# Altium PCB Board.PcbDoc
Units mil, origin at the board's own origin, x right, y up, seen from the top; angles counter-clockwise.
Board outline 6000 x 4000 mil, 2 copper layers (Top Layer, Bottom Layer); 112 components, 93 nets, 348 pads, 0 vias.
Unrouted connection lines stored in the file: 236.
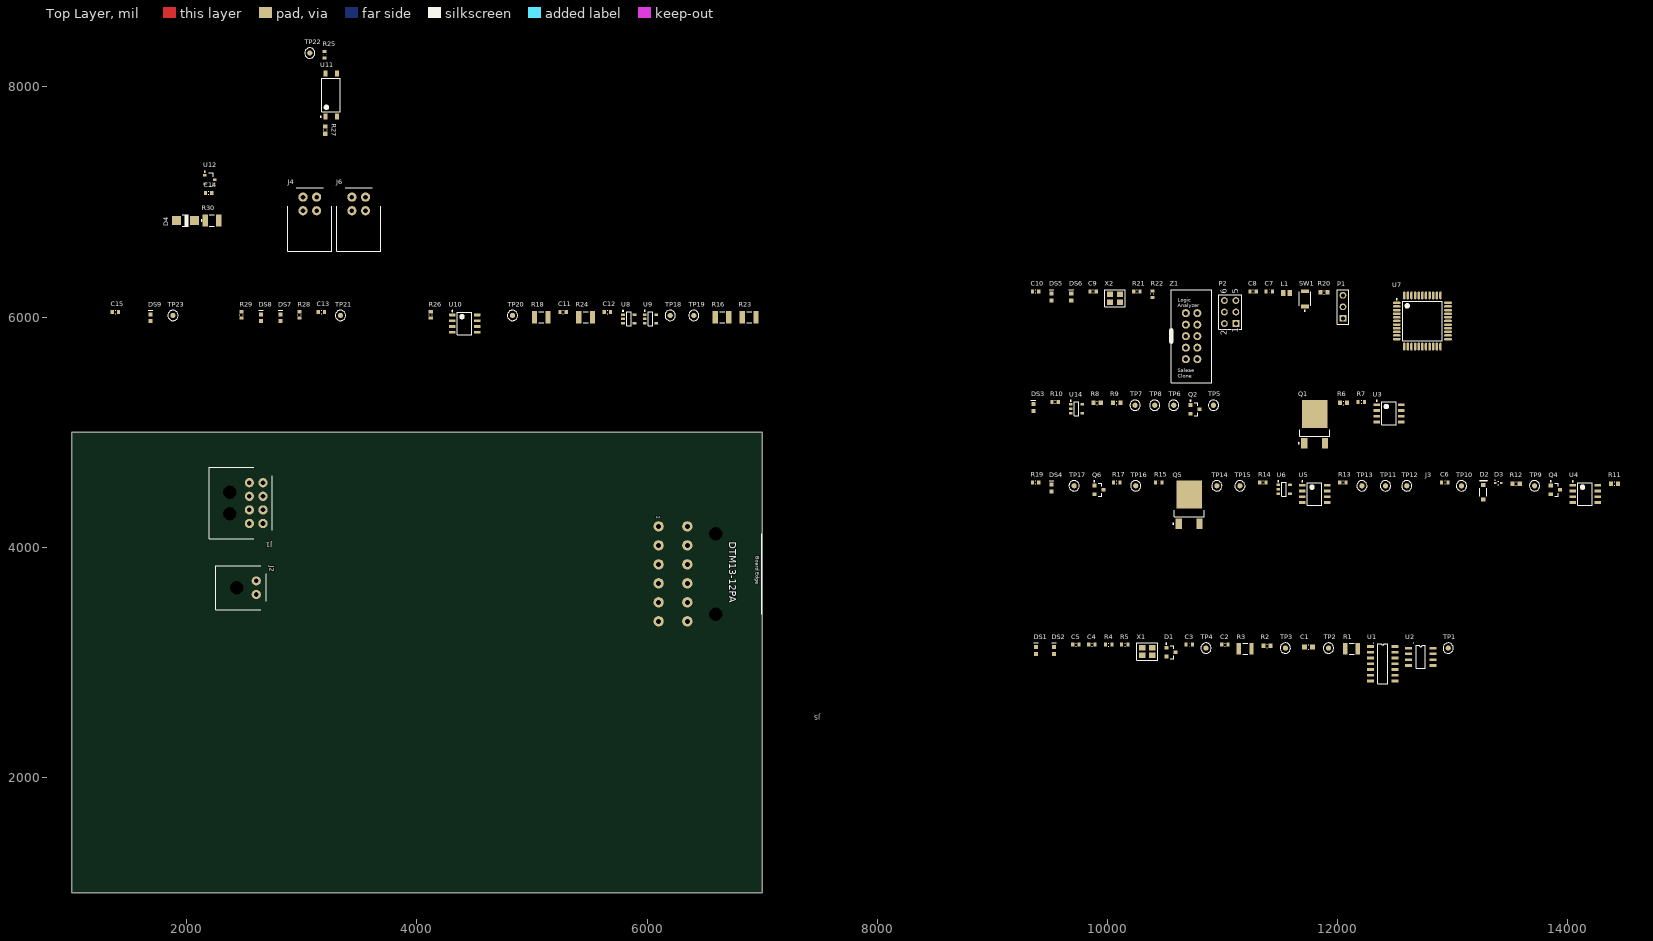
[diagram p0: Top Layer view]
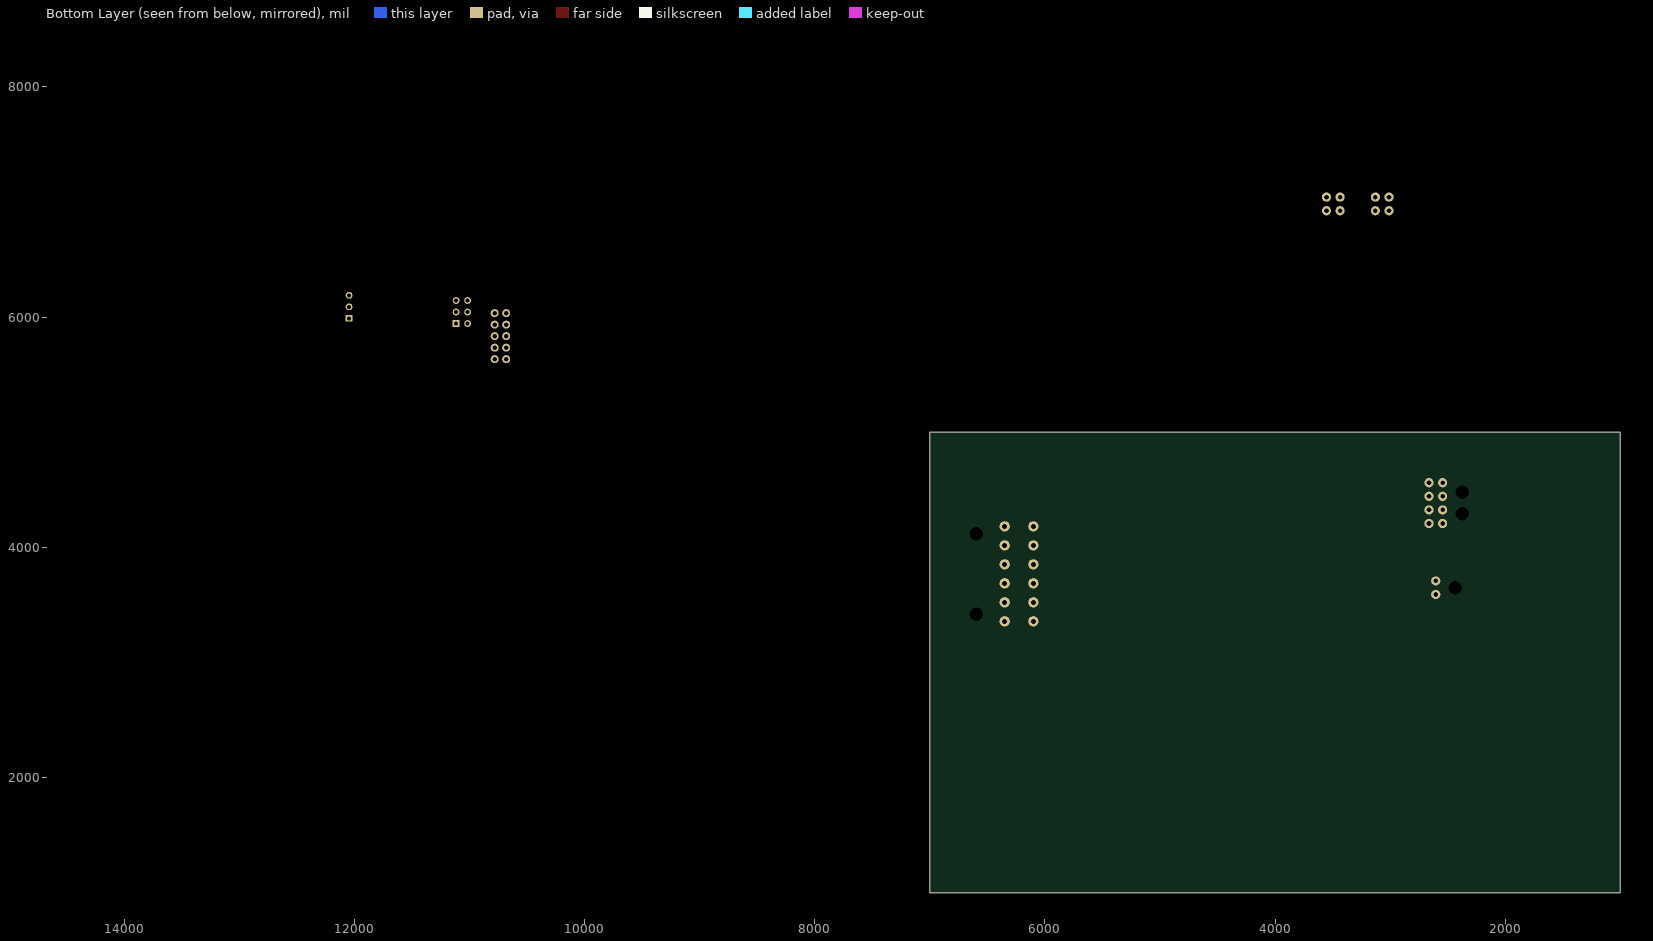
[diagram p1: Bottom Layer view, seen from below]

## Layer stack, top to bottom
Top Solder: solder mask 0.4, Solder Resist, Dk 3.5
Top Layer: signal copper 1.4
Dielectric 1: dielectric 12.6, FR-4, Dk 4.8
Bottom Layer: signal copper 1.4
Bottom Solder: solder mask 0.4, Solder Resist, Dk 3.5

## Board outline
1000,1000 7000,1000 7000,5000 1000,5000

## Design rules (kind name [scope] priority, off if disabled: settings)
Clearance [All] p1: gap=10 ignorepadtopadclearanceinfootprint=FALSE except(0: Arc-Hole Track-Hole SMDPad-Hole THPad-Hole Via-Hole Fill-Hole Poly-Hole Region-Hole Text-Hole)
PolygonConnect [All] p1: connectstyle=Relief reliefconductorwidth=10 reliefentries=4 polygonreliefangle="90 Angle" airgapwidth=10
RoutingVias [All] p1: holewidth=28 width=50 viastyle="Through Hole" minholewidth=28 minwidth=50 maxholewidth=28 maxwidth=50
SolderMaskExpansion [All] p1: expansion=4
Width [All] p1: maxlimit=10 minlimit=10 preferedwidth=10
30 further rules are at their usual default settings.

## Classes and differential pairs
component class "Tractive System Active Light Driving Circuity (TSAL)": C11 C12 C13 C14 C15 D4 DS7 DS8 DS9 R16 R18 R23 R24 R25 R26 R27 R28 R29 R30 TP18 TP19 TP20 TP21 TP22 TP23 U8 U9 U10 U11 U12
component class Microcontroller: C7 C8 C9 C10 DS5 DS6 L1 P1 P2 R20 R21 R22 SW1 U7 X2 Z1
component class "Insulation Monitoring Device": DS3 J1 Q1 Q2 R6 R7 R8 R9 R10 TP5 TP6 TP7 TP8 U3 U14
component class "Current Sensor (LEM)": C6 D2 D3 DS4 J2 J3 Q4 Q5 Q6 R11 R12 R13 R14 R15 R17 R19 TP9 TP10 TP11 TP12 TP13 TP14 TP15 TP16 TP17 U4 U5 U6 VR1
component class Connector: J4 J5 J6
component class CANBUS: C1 C2 C3 C4 C5 D1 DS1 DS2 R1 R2 R3 R4 R5 TP1 TP2 TP3 TP4 U1 U2 X1

## Components (designator, comment, footprint, x,y, rotation, side; value= is the part's Value field where it differs from the comment)
C1 "CAP 4.7nF 50V 0603(1608)" CAPC0603(1608)100_M 11745,3135 r0 top value=4.7nF
C2 "CAP 100nF 50V 0603(1608)" CAPC0603(1608)100_L 11020,3155 r0 top value=100nF
C3 "CAP 100nF 50V 0603(1608)" CAPC0603(1608)100_L 10710,3155 r0 top value=100nF
C4 "CAP 18pF 50V 0603(1608)" CAPC0603(1608)100_L 9865,3155 r0 top value=18pF
C5 "CAP 18pF 50V 0603(1608)" CAPC0603(1608)100_L 9725,3155 r0 top value=18pF
C6 "CAP 100nF 50V" CAPC0603(1608)100_L 12930,4565 r0 top value=100nF
C7 "CAP 100nF 50V 0603(1608)" CAPC0603(1608)100_L 11405,6225 r0 top value=100nF
C8 "CAP 100nF 50V 0603(1608)" CAPC0603(1608)100_L 11265,6225 r0 top value=100nF
C9 "CAP 18pF 50V 0603(1608)" CAPC0603(1608)100_L 9875,6225 r0 top value=18pF
C10 "CAP 18pF 50V 0603(1608)" CAPC0603(1608)100_L 9375,6225 r0 top value=18pF
C11 "CAP 100nF 50V" CAPC0603(1608)100_L 5270.94,6045 r0 top value=100nF
C12 "CAP 100nF 50V" CAPC0603(1608)100_L 5655.94,6045 r0 top value=100nF
C13 "CAP 100nF 50V" CAPC0603(1608)100_L 3170.94,6045 r0 top value=100nF
C14 "CAP 100nF 50V" CAPC0603(1608)100_L 2190,7080 r0 top value=100nF
C15 "CAP 100nF 50V" CAPC0603(1608)100_L 1380.94,6045 r0 top value=100nF
D1 "NUP2105LT1G" ONSC-SOT-23-3-318-08_V 10550,3090 r0 top
D2 "BZT52C5V1-7-F" DIOD-SOD123_V 13265,4480 r90 top
D3 "ESD5Z5.0T1G" ONSC-SOD-523-2-502-01_V 13395,4560 r0 top
D4 "18V Zener SMA" ONSC-SMA-2-403D-02_F_V 1990,6840 r180 top
DS1 "LED Blue 0603" "LED BLUE 0603" 9380,3105 r90 top
DS2 "LED Blue 0603" "LED BLUE 0603" 9535,3105 r90 top
DS3 "LED Red 0603" "LED RED 0603" 9355,5215 r90 top
DS4 "LED Red 0603" "LED RED 0603" 9515,4515 r90 top
DS5 "LED Orange 0603" "LED ORANGE 0603" 9515,6175 r90 top
DS6 "LED Orange 0603" "LED ORANGE 0603" 9685,6175 r90 top
DS7 "LED Red 0603" "LED RED 0603" 2815.94,5995 r90 top
DS8 "LED Red 0603" "LED RED 0603" 2645.94,5995 r90 top
DS9 "LED Red 0603" "LED RED 0603" 1685.94,5995 r90 top
J1 "Microfit 3.0 2x4" Microfit_2X4_R_TH 2375,4385 r270 top
J2 "Microfit 3.0 1x2" Microfit_1X2_R_TH 2435,3650 r270 top
J3 "Microfit 3.0 2x3" Microfit_2X3_R_SMD 12760,4580 r90 top
J4 "Microfit 3.0 2x2" Microfit_2X2_R_TH 3070,6755 r0 top
J5 "DTM12" DTM13-12PA 6595,3770 r270 top
J6 "Microfit 3.0 2x2" Microfit_2X2_R_TH 3495,6755 r0 top
L1 "LQM21FN100M70L" MURA-IND0805_L 11555,6210 r0 top
P1 "Header 3" HDR1X3 12045,5990 r90 top
P2 "Header 3X2" HDR2X3 11115,5945 r90 top
Q1 "SUD50P06-15-GE3" VSIL-TO-252AA-3_V 11800,5070 r90 top
Q2 "NVR5198NLT1G" ONSC-SOT-23-3-318-08_V 10760,5200 r0 top
Q4 "NVR5198NLT1G" ONSC-SOT-23-3-318-08_V 13890,4500 r0 top
Q5 "SUD50P06-15-GE3" VSIL-TO-252AA-3_V 10710,4370 r90 top
Q6 "NVR5198NLT1G" ONSC-SOT-23-3-318-08_V 9925,4500 r0 top
R1 "60R4 1% 1210(3225)" RESC1210(3225)_L 12120,3120 r0 top value="60.40 Ohm"
R2 "300R 5% 0603(1608)" RESC0603(1608)_N 11385,3145 r0 top value="300.00 Ohm"
R3 "60R4 1% 1210(3225)" RESC1210(3225)_L 11195,3120 r0 top value="60.40 Ohm"
R4 "1K 5% 0603(1608)" RESC0603(1608)_L 10010,3155 r0 top value="1000.00 Ohm"
R5 "1K 5% 0603(1608)" RESC0603(1608)_L 10150,3155 r0 top value="1000.00 Ohm"
R6 "2K2 5% 0603(1608)" RESC0603(1608)_N 12050,5255 r0 top value="2200.00 Ohm"
R7 "1K 5% 0603(1608)" RESC0603(1608)_L 12205,5265 r0 top value="1000.00 Ohm"
R8 "2K2 5% 0603(1608)" RESC0603(1608)_N 9910,5255 r0 top value="2200.00 Ohm"
R9 "2K2 5% 0603(1608)" RESC0603(1608)_N 10080,5255 r0 top value="2200.00 Ohm"
R10 "1K 5% 0603(1608)" RESC0603(1608)_L 9545,5265 r0 top value="1000.00 Ohm"
R11 "10K 5% 0603(1608)" RESC0603(1608)_N 14405,4555 r0 top value="10000.00 Ohm"
R12 "4K7 5% 0603(1608)" RESC0603(1608)_N 13550,4555 r0 top value="4700.00 Ohm"
R13 "1K 5% 0603(1608)" RESC0603(1608)_L 12045,4565 r0 top value="1000.00 Ohm"
R14 "1K 5% 0603(1608)" RESC0603(1608)_L 11350,4565 r0 top value="1000.00 Ohm"
R15 "1K 5% 0603(1608)" RESC0603(1608)_L 10445,4565 r0 top value="1000.00 Ohm"
R16 "9K1 5% 1210(3225)" RESC1210(3225)_N 6650.94,6000 r0 top value="9100.00 Ohm"
R17 "DNP" RESC0603(1608)_L 10080,4565 r0 top
R18 "1K 5% 1210(3225)" RESC1210(3225)_N 5080.94,6000 r0 top value="1000.00 Ohm"
R19 "DNP" RESC0603(1608)_L 9375,4565 r0 top
R20 "10K 5% 0603(1608)" RESC0603(1608)_N 11880,6215 r0 top value="10000.00 Ohm"
R21 "1K 5% 0603(1608)" RESC0603(1608)_L 10255,6225 r0 top value="1000.00 Ohm"
R22 "1K 5% 0603(1608)" RESC0603(1608)_L 10390,6200 r90 top value="1000.00 Ohm"
R23 "1K 5% 1210(3225)" RESC1210(3225)_N 6885.94,6000 r0 top value="1000.00 Ohm"
R24 "1K 5% 1210(3225)" RESC1210(3225)_N 5465.94,6000 r0 top value="1000.00 Ohm"
R25 "1K 5% 0603(1608)" RESC0603(1608)_L 3198.5,8280 r90 top value="1000.00 Ohm"
R26 "1K 5% 0603(1608)" RESC0603(1608)_L 4120.94,6020 r90 top value="1000.00 Ohm"
R27 "2K2 5% 0603(1608)" RESC0603(1608)_N 3205,7625 r270 top value="2200.00 Ohm"
R28 "1K 5% 0603(1608)" RESC0603(1608)_L 2980.94,6020 r90 top value="1000.00 Ohm"
R29 "1K 5% 0603(1608)" RESC0603(1608)_L 2475.94,6020 r90 top value="1000.00 Ohm"
R30 "1K 5% 1210(3225)" RESC1210(3225)_N 2220,6840 r0 top value="1000.00 Ohm"
SW1 "B3U-1000P" OMRON-B3U-1000_V 11715,6160 r90 top
TP1 "TestPoint_SMD" TestPointSMD 12960,3125 r0 top
TP2 "TestPoint_SMD" TestPointSMD 11920,3125 r0 top
TP3 "TestPoint_SMD" TestPointSMD 11545,3125 r0 top
TP4 "TestPoint_SMD" TestPointSMD 10855,3125 r0 top
TP5 "TestPoint_SMD" TestPointSMD 10920,5235 r0 top
TP6 "TestPoint_SMD" TestPointSMD 10575,5235 r0 top
TP7 "TestPoint_SMD" TestPointSMD 10240,5235 r0 top
TP8 "TestPoint_SMD" TestPointSMD 10410,5235 r0 top
TP9 "TestPoint_SMD" TestPointSMD 13710,4535 r0 top
TP10 "TestPoint_SMD" TestPointSMD 13075,4535 r0 top
TP11 "TestPoint_SMD" TestPointSMD 12415,4535 r0 top
TP12 "TestPoint_SMD" TestPointSMD 12600,4535 r0 top
TP13 "TestPoint_SMD" TestPointSMD 12210,4535 r0 top
TP14 "TestPoint_SMD" TestPointSMD 10950,4535 r0 top
TP15 "TestPoint_SMD" TestPointSMD 11150,4535 r0 top
TP16 "TestPoint_SMD" TestPointSMD 10245,4535 r0 top
TP17 "TestPoint_SMD" TestPointSMD 9710,4535 r0 top
TP18 "TestPoint_SMD" TestPointSMD 6200.94,6015 r0 top
TP19 "TestPoint_SMD" TestPointSMD 6405.94,6015 r0 top
TP20 "TestPoint_SMD" TestPointSMD 4830.94,6015 r0 top
TP21 "TestPoint_SMD" TestPointSMD 3335.94,6015 r0 top
TP22 "TestPoint_SMD" TestPointSMD 3070,8295 r0 top
TP23 "TestPoint_SMD" TestPointSMD 1880.94,6015 r0 top
U1 "MCP2518FD" "MCP2517FD SOIC" 12285,3140 r0 top
U2 "MCP2561" "MCP2561 SOIC" 12615,3125 r0 top
U3 "LM358AM" D0008A_N 12445,5165 r0 top
U4 "LM358AM" D0008A_N 14150,4465 r0 top
U5 "LM358AM" D0008A_N 11800,4465 r0 top
U6 "SN74LVC1G17DBVR" DBV0005A_L 11535,4505 r0 top
U7 "ATmega1284P-AU" 44A_N 12735.12,5967.01 r0 top
U8 "SN74LVC1G17DBVR" DBV0005A_L 5840.94,5985 r0 top
U9 "SN74LVC1G17DBVR" DBV0005A_L 6030.94,5985 r0 top
U10 "LM358AM" D0008A_N 4415.94,5945 r0 top
U11 "TCLT1000" VISH-SOP4L-4_V 3255,7930 r90 top
U12 "LM3480IM3-12" DBZ0003A_L 2201.69,7195 r0 top
U14 "SN74LVC1G17DBVR" DBV0005A_L 9730,5205 r0 top
X1 "XTAL_20Mz_3.2mm*2.5mm" 3.2mm*2.5mm 10345,3095 r0 top
X2 "XTAL_16Mz_3.2mm*2.5mm" 3.2mm*2.5mm 10065,6165 r0 top
Z1 "LogicAnalyzerBreakOut" LogicAnalyzer 10730,5835 r0 top

## Footprints (in the part's own frame and the unit in brackets; to place one, negate y for a bottom-side part, rotate by r counter-clockwise, add the part's x,y. Pads: shape width x height; smd on the part's side, far side on the other; paste and mask are expansions set on the pad)
3.2mm*2.5mm [mm]
  rect 1.4x1.2 smd: 1(-1.1,-0.85) 2(1.1,-0.85) 3(1.1,0.85) 4(-1.1,0.85)
  silkscreen extent -2.29,-1.91 2.29,1.91, body extent -1.6,-1.25 1.6,1.25, height 0.8
44A_N [mm] "Thin QFP, 44-Leads, Body 10x10mm, Pitch 0.8mm, IPC Medium Density"
  oval 1.75x0.55 smd: 1(-5.65,4) 2(-5.65,3.2) 3(-5.65,2.4) 4(-5.65,1.6) 5(-5.65,0.8) 6(-5.65,0) 7(-5.65,-0.8) 8(-5.65,-1.6) 9(-5.65,-2.4) 10(-5.65,-3.2) 11(-5.65,-4) 23(5.65,-4) 24(5.65,-3.2) 25(5.65,-2.4) 26(5.65,-1.6) 27(5.65,-0.8) 28(5.65,0) 29(5.65,0.8) 30(5.65,1.6) 31(5.65,2.4) 32(5.65,3.2) 33(5.65,4)
  oval 0.55x1.75 smd: 12(-4,-5.65) 13(-3.2,-5.65) 14(-2.4,-5.65) 15(-1.6,-5.65) 16(-0.8,-5.65) 17(0,-5.65) 18(0.8,-5.65) 19(1.6,-5.65) 20(2.4,-5.65) 21(3.2,-5.65) 22(4,-5.65) 34(4,5.65) 35(3.2,5.65) 36(2.4,5.65) 37(1.6,5.65) 38(0.8,5.65) 39(0,5.65) 40(-0.8,5.65) 41(-1.6,5.65) 42(-2.4,5.65) 43(-3.2,5.65) 44(-4,5.65)
  silkscreen extent -5.77,-4.35 4.35,4.95, body extent -5,-5 5,5, height 1.2
CAPC0603(1608)100_L [mm] "Chip Capacitor, Body 1.6x0.8mm, Height 1.0mm, IPC High Density"
  rect 0.7x0.9 smd: 1(-0.7,0) 2(0.7,0)
  silkscreen extent -0.05,-0.35 0.05,0.35, body extent -0.87,-0.47 0.88,0.48, height 1
CAPC0603(1608)100_M [mm] "Chip Capacitor, Body 1.6x0.8mm, Height 1.0mm, IPC Low Density"
  rect 1.1x1.1 smd: 1(-0.9,0) 2(0.9,0)
  silkscreen extent -0.05,-0.45 0.05,0.45, body extent -0.87,-0.47 0.88,0.48, height 1
D0008A_N [mm] "SOIC, 8-Leads, Body 5x4mm, Pitch 1.27mm, IPC Medium Density"
  rrect17% 1.45x0.6 smd: 1(-2.725,1.905) 2(-2.725,0.635) 3(-2.725,-0.635) 4(-2.725,-1.905) 5(2.725,-1.905) 6(2.725,-0.635) 7(2.725,0.635) 8(2.725,1.905)
  silkscreen extent -2.85,-2.5 1.6,2.88, body extent -3,-2.45 3,2.45, height 1.63
DBV0005A_L [mm] "SOT23, 5-Leads, Body 3.05x1.75mm, Pitch 0.95mm, IPC High Density"
  rrect18% 0.8x0.55 smd: 1(-1.275,0.95) 2(-1.275,0) 3(-1.275,-0.95) 4(1.275,-0.95) 5(1.275,0.95)
  silkscreen extent -1.4,-1.55 0.5,1.9, body extent -1.42,-1.46 1.42,1.46, height 1.08
DBZ0003A_L [mm] "SOT23, 3-Leads, Body 3.04x1.4mm, Pitch 0.95mm, IPC High Density"
  rrect18% 0.8x0.55 smd: 1(-1.1,0.95) 2(-1.1,-0.95) 3(1.1,0)
  silkscreen extent -1.22,-1.5 0.7,1.9, body extent -1.26,-1.46 1.26,1.46, height 0.96
DIOD-SOD123_V [mm] "SMD, 2-Leads, Body 2.7x1.55mm"
  rect 0.9x0.95 smd: 1(-1.575,0) 2(1.575,0)
  silkscreen extent -0.86,-0.77 2.52,0.77, body extent -1.35,-0.77 1.35,0.77, height 1.41
DTM13-12PA [mil]
  round 90 hole 45: 1(412.5,-495) 2(247.5,-495) 3(82.5,-495) 4(-82.5,-495) 5(-247.5,-495) 6(-412.5,-495) 7(-412.5,-245) 8(-247.5,-245) 9(-82.5,-245) 10(82.5,-245) 11(247.5,-245) 12(412.5,-245)
  round 0 hole 118.11 mask+39.37: NC(-350,0) NC(350,0)
  silkscreen extent -350,400 350,400, body extent -1200,-590 1200,914, height 1350
HDR1X3 [mm] "Connector; Header; 3 Position"
  rect 1.5x1.5 hole 0.9: 1(0,0)
  round 1.5 hole 0.9: 2(2.54,0) 3(5.08,0)
  silkscreen extent -1.27,-1.27 6.35,1.27
HDR2X3 [mm] "Connector; Header; 3x2 Position"
  rect 1.5x1.5 hole 0.9: 1(0,0)
  round 1.5 hole 0.9: 2(0,2.54) 3(2.54,0) 4(2.54,2.54) 5(5.08,0) 6(5.08,2.54)
  silkscreen extent -1.27,-1.27 6.35,3.81
"LED BLUE 0603" [mil]
  rect 35x35 smd: 1(-30,0) 2(30,0)
  silkscreen extent 65,-20 65,20, body extent -40,-20 40,20, height 30
"LED ORANGE 0603" [mil]
  rect 35x35 smd: 1(-30,0) 2(30,0)
  silkscreen extent 65,-20 65,20, body extent -40,-20 40,20, height 30
"LED RED 0603" [mil]
  rect 35x35 smd: 1(-30,0) 2(30,0)
  silkscreen extent 65,-20 65,20, body extent -40,-20 40,20, height 30
LogicAnalyzer [mil]
  round 70 hole 40: 1(-50,200) 2(50,200) 3(-50,100) 4(50,100) 5(-50,0) 6(50,0) 7(-50,-100) 8(50,-100) 9(-50,-200) 10(50,-200)
  silkscreen extent -175,-405 175,405, body extent -175,-404 175,404, height 359
"MCP2517FD SOIC" [mm]
  rect 1.5x0.6 smd: 1(0,0) 2(0,-1.27) 3(0,-2.54) 4(0,-3.81) 5(0,-5.08) 6(0,-6.35) 7(0,-7.62) 8(5.4,-7.62) 9(5.4,-6.35) 10(5.4,-5.08) 11(5.4,-3.81) 12(5.4,-2.54) 13(5.4,-1.27) 14(5.4,0)
  silkscreen extent 0.64,-8.25 3.76,0.76, body extent 0.74,-8.13 4.64,0.52, height 1.74
"MCP2561 SOIC" [mm]
  rect 1.55x0.6 smd: 1(0,0) 2(0,-1.27) 3(0,-2.54) 4(0,-3.81) 5(5.4,-3.81) 6(5.4,-2.54) 7(5.4,-1.27) 8(5.4,0)
  silkscreen extent 1.02,-4.44 3.74,1.14, body extent 0.51,-4.38 4.64,0.52, height 1.65
Microfit_1X2_R_TH [mil]
  round 80 hole 40: 1(59.06,170) 2(-59.06,170)
  round 0 hole 118.11 mask+10: NC(0,0)
  silkscreen extent -190,-180 190,255, body extent -190,-180 190,210, height 223
Microfit_2X2_R_TH [mil]
  round 80 hole 40: 1(59.06,170) 2(-59.06,170) 3(59.06,288.19) 4(-59.06,288.19)
  round 0 hole 118.11 mask+10: NC(0,0)
  silkscreen extent -190,-180 190,370, body extent -200,-180 200,302, height 350
Microfit_2X3_R_SMD [mil]
Microfit_2X4_R_TH [mil]
  round 80 hole 40: 1(177.17,170) 2(59.06,170) 3(-59.06,170) 4(-177.17,170) 5(177.17,288.19) 6(59.06,288.19) 7(-59.06,288.19) 8(-177.17,288.19)
  round 0 hole 118.11 mask+10: NC(-92.52,0) NC(92.52,0)
  silkscreen extent -310,-180 310,370, body extent -318,-180 318,302, height 350
MURA-IND0805_L [mm] "Chip Inductor, 2-Leads, Body 2.2x1.45mm, IPC High Density"
  rect 0.99x1.39 smd: 1(-0.755,0) 2(0.755,0)
  body extent -1.1,-0.72 1.1,0.72, height 1.45
OMRON-B3U-1000_V [mm] "SMD, 2-Leads, Body 3x2.5mm"
  rect 0.8x1.7 smd: 1(-1.7,0) 2(1.7,0)
  silkscreen extent -2.77,-1.25 1.5,1.25, body extent -1.5,-1.25 1.5,1.25, height 1.75
ONSC-SMA-2-403D-02_F_V [mm] "Molded, 2-Leads, Body 4.32x2.6mm"
  rect 2x2 smd: 1(-2,0) 2(2,0)
  silkscreen extent -3.68,-1.3 0.74,1.3, body extent -2.16,-1.3 2.16,1.3, height 2.2
ONSC-SOD-523-2-502-01_V [mm] "SOD, 2-Leads, Body 1.2x0.8mm"
  rect 0.48x0.4 smd: 1(-0.66,0) 2(0.66,0)
  silkscreen extent -0.75,-0.4 0.07,0.65, body extent -0.6,-0.4 0.6,0.4, height 0.7
ONSC-SOT-23-3-318-08_V [mm] "SOT23, 3-Leads, Body 2.92x1.3mm, Pitch 0.95mm"
  rect 0.9x0.8 smd: 1(-1,0.95) 2(-1,-0.95) 3(1,0)
  silkscreen extent -1.12,-1.46 0.65,2.02, body extent -0.65,-1.46 0.65,1.46, height 1.11
RESC0603(1608)_L [mm] "Chip Resistor, Body 1.6x0.8mm, IPC High Density"
  rect 0.7x0.9 smd: 1(-0.7,0) 2(0.7,0)
  silkscreen extent -0.05,-0.35 0.05,0.35, body extent -0.85,-0.47 0.85,0.47, height 0.6
RESC0603(1608)_N [mm] "Chip Resistor, Body 1.6x0.8mm, IPC Medium Density"
  rect 0.9x1 smd: 1(-0.8,0) 2(0.8,0)
  silkscreen extent -0.05,-0.4 0.05,0.4, body extent -0.85,-0.47 0.85,0.47, height 0.6
RESC1210(3225)_L [mm] "Chip Resistor, Body 3.2x2.5mm, IPC High Density"
  rect 0.95x2.6 smd: 1(-1.4,0) 2(1.4,0)
  silkscreen extent -0.55,-1.2 0.55,1.2, body extent -1.7,-1.35 1.7,1.35, height 0.71
RESC1210(3225)_N [mm] "Chip Resistor, Body 3.2x2.5mm, IPC Medium Density"
  rect 1.15x2.7 smd: 1(-1.5,0) 2(1.5,0)
  silkscreen extent -0.55,-1.25 0.55,1.25, body extent -1.7,-1.35 1.7,1.35, height 0.71
TestPointSMD [mil]
  round 45 smd: 1(0,0)
  silkscreen extent -45,-45 45,45
VISH-SOP4L-4_V [mm] "SOP, 4-Leads, Body 4.1x7.7mm, Pitch 2.54mm"
  rect 1.3x0.9 smd: 1(-4.75,1.27) 2(-4.75,-1.27) 3(4.75,-1.27) 4(4.75,1.27)
  silkscreen extent -4.87,-2.05 3.7,2.39, body extent -5.07,-2.05 5.07,2.05, height 2.3
VSIL-TO-252AA-3_V [mm] "DPAK, 3-Leads, Body 6.73x6.22mm, Pitch 2.28mm"
  rect 2.286x1.397 smd: 1(-4.185,2.28) 3(-4.185,-2.28)
  rect 6.18x5.69 smd: 2(2.25,0)
  silkscreen extent -4.32,-3.35 -1.24,3.65, body extent -2.8,-3.37 3.42,3.37, height 2.38

## Part data
C1: library part CMP-1035-02202-1, "CAP 4.7nF 50V ±5% 0603 (1608 Metric) Thickness 1mm SMD", Case-EIA=0603, Case-Metric=1608, Rated Voltage="50 V", Tolerance=±5%, Max Thickness="1 mm", Technology=SMT
C2 C3 C6 C7 C8 C11 C12 C13 C14 C15: library part CMP-1035-02591-1, "CAP 100nF 50V ±5% 0603 (1608 Metric) Thickness 1mm SMD", Case-EIA=0603, Case-Metric=1608, Rated Voltage="50 V", Tolerance=±5%, Max Thickness="1 mm", Technology=SMT
C4 C5 C9 C10: library part CMP-1035-00748-1, "CAP 18pF 50V ±1% 0603 (1608 Metric) Thickness 1mm SMD", Case-EIA=0603, Case-Metric=1608, Rated Voltage="50 V", Tolerance=±1%, Max Thickness="1 mm", Technology=SMT
D1: library part CMP-1063-00164-1, "Dual Line CAN Bus Protector, 3-Pin SOT-23, Pb-Free, Tape and Reel", Manufacturer="On Semiconductor", C Max (pF)=30, ComponentLink1Description="Manufacturer URL", ComponentLink1URL=http://www.onsemi.com/, ComponentLink2Description=Datasheet, ComponentLink2URL=http://www.onsemi.cn/pub_link/Collateral/NUP2105L-D.PDF, ComponentLink3Description="Package Specification", ComponentLink3URL=http://www.onsemi.cn/pub_link/Collateral/318-08.PDF, DatasheetVersion="Rev. 5", Direction=Bidirectional, IR Max (uA)=0.1, Mounting Technology="Surface Mount", Number of Lines=2, PackageDescription="3-Pin Small Outline Transistor, Body 2.92 x 1.3 mm, Pitch 0.95 mm", PackageReference=SOT-23-3-318-08, PackageVersion="Rev. AP, 11/2009", Packing="Tape and Reel", PartNumber=NUP2105LT1G, PPK Max (W)=350, RoHS=Pb-Free, V(BR) Min (V)=26.2
D2: library part CMP-2000-05976-1, "Surface Mount Zener Diode, 5.1 V, -65 to 150 degC, 2-Pin SMD (SOD-123), RoHS, Tape and Reel", Ir - Reverse Current=2uA, Manufacturer=DiodesIncorporated, Maximum Operating Temperature=+150C, Minimum Operating Temperature=-65C, Package / Case=SOD-123, Package Description="2-Pin Surface Mount Device, Body 2.7 x 1.55 mm", Package Reference=SOD123, Pd - Power Dissipation=500mW, Voltage Temperature Coefficient=-0.75mV/C, Voltage Tolerance=6%, Vz - Zener Voltage=5.1V, Zener Current=5mA, Brand=DiodesIncorporated, Configuration=Single, Datasheet URL=http://www.diodes.com/_files/datasheets/ds18004.pdf, Datasheet Version="Rev. 37-2, 09/2012", Factory Pack Quantity=3000, Height=1.35mm, Length=2.85mm, Manufacturer URL=http://www.diodes.com/, Mounting Style=SMD/SMT, Mounting Technology=SurfaceMount, Packaging=Reel, Product Category=ZenerDiodes, RoHS=True, Series=BZT52C5, Termination Style=SMD/SMT, Unit Weight=0.000353oz, Width=1.7mm, Zz - Zener Impedance=60Ohms
D3: library part CMP-1063-00102-1, "Transient Voltage Suppressor, Micro-Packaged Diode for ESD Protection, 2-Pin SOD-523, Pb-Free, Tape and Reel", Manufacturer="On Semiconductor", ComponentLink1Description="Manufacturer URL", ComponentLink1URL=http://www.onsemi.com/, ComponentLink2Description=Datasheet, ComponentLink2URL=http://www.onsemi.cn/pub_link/Collateral/ESD5Z2.5T1-D.PDF, ComponentLink3Description="Package Specification", ComponentLink3URL=http://www.onsemi.com/pub_link/Collateral/502-01.PDF, DatasheetVersion="Rev. 10", Direction=Unidirectional, IR Max (uA)=0.05, Mounting Technology="Surface Mount", Number of Lines=1, PackageDescription="2-Pin SOD, Body 1.2 x 0.8 mm", PackageReference=SOD-523-2-502-01, PackageVersion="Rev. E, 09/2010", Packing="Tape and Reel", PartNumber=ESD5Z5.0T1G, PPK Max (W)=174, RoHS=Pb-Free, V(BR) Min (V)=6.2, VRWM Max (V)=5
D4: library part CMP-1060-00118-1, "1.5 W Zener Voltage Regulator, 2-Pin SMA, Pb-Free, Tape and Reel", Manufacturer="On Semiconductor", PartNumber=1SMA5931BT3G, ComponentLink1Description="Manufacturer URL", ComponentLink1URL=http://www.onsemi.com/, ComponentLink2Description=Datasheet, ComponentLink2URL=http://www.onsemi.com/pub_link/Collateral/1SMA5913BT3-D.PDF, ComponentLink3Description="Package Specification", ComponentLink3URL=http://www.onsemi.com/pub_link/Collateral/1SMA5913BT3-D.PDF, DatasheetVersion="Rev. 8", Mounting Technology="Surface Mount", PackageDescription="2-Pin Small Molded Package, J-Bend Lead, Body 2.605 x 4.315 mm", PackageReference=SMA-2-403D-02_F, PackageVersion="Rev. F, 11/2008", Packing="Tape and Reel", RoHS=Pb-Free, VZ Typ (V)=18
DS1 DS2: library part "LED BLUE 0603"
DS3 DS4 DS7 DS8 DS9: library part "LED RED 0603"
DS5 DS6: library part "LED ORANGE 0603"
J1: library part Microfit_2x4
J2: library part Microfit_1x2
J3: library part Microfit_2x3
J4 J6: library part Microfit_2x2
L1: library part CMP-2000-06587-1, "Fixed Inductor, 10 uH, +/-20%, -55 to 125 degC, 2-Pin SMD (0805), RoHS, Tape and Reel", Case Size/Dimension=0805, DC Resistance=0.6, Inductance-Nom=10H, Manufacturer=Murata, Package Description="2-Pin Surface Mount Device, Body 2 x 1.25 mm", Package Reference=IND0805, Rated Current-Max=100mA, Tolerance (%)=20%, Datasheet URL=http://psearch.en.murata.com/inductor/product/LQM21FN100M70%23.pdf, Datasheet Version=05/2016, Manufacturer URL=http://www.murata.com/, Mounting Technology=SurfaceMount
P1: "Header, 3-Pin", LatestRevisionDate=17-Jul-2002, LatestRevisionNote="Re-released for DXP Platform.", Publisher="Altium Limited"
P2: "Header, 3-Pin, Dual row", LatestRevisionDate=17-Jul-2002, LatestRevisionNote="Re-released for DXP Platform.", Publisher="Altium Limited"
Q1 Q5: library part CMP-2000-05431-1, "P-Channel (D-S) MOSFET, 30 V, -55 to 150 degC, 3-Pin TO-252, RoHS, Tape and Reel", Id - Continuous Drain Current=50A, Manufacturer=Vishay, Maximum Operating Temperature=+150C, Minimum Operating Temperature=-55C, Package / Case=TO-252AA-3, Package Description="3-Pin Surface Mount Device, Body 6.54 x 6.095 mm, Pitch 2.28 mm", Package Reference=TO-252, Pd - Power Dissipation=2.5W, Rds On - Drain-Source Resistance=15mOhms, Vds - Drain-Source Breakdown Voltage=-60V, Vgs - Gate-Source Voltage=20V, Brand=VishaySemiconductors, Channel Mode=Enhancement, Configuration=Single, Datasheet URL=https://datasheet.ciiva.com/4444/sud50p06-244530-4444327.pdf, Datasheet Version="Rev. C, 07/2013", Factory Pack Quantity=2000, Fall Time=175ns, Height=2.39mm, Length=6.73mm, Manufacturer URL=http://www.vishay.com/, Mounting Style=SMD/SMT, Number of Channels=1Channel, Package URL=http://www.vishay.com/docs/89975/v15wl45c-m3.pdf, Packaging=Reel, Product Category=MOSFET, Rise Time=70ns, RoHS=True, Series=SUD, Technology=Si, Tradename=TrenchFET, Transistor Polarity=P-Channel, Transistor Type=1P-Channel, Typical Turn-Off Delay Time=175ns, Typical Turn-On Delay Time=15ns, Unit Weight=0.050717oz, Width=6.22mm
Q2 Q4 Q6: library part CMP-1058-00774-1, "Power MOSFET, 60 V, 155 mOhm, Single N-Channel Logic Level, 3-Pin SOT-23, Pb-Free, Tape and Reel", Manufacturer="On Semiconductor", Package Type=SOT-23-3, Channel Polarity="N Channel", Ciss Typ (pF)=182, ComponentLink1Description="Manufacturer URL", ComponentLink1URL=http://www.onsemi.com/, ComponentLink2Description=Datasheet, ComponentLink2URL=http://www.onsemi.com/pub_link/Collateral/NVR5198NL-D.PDF, ComponentLink3Description="Package Specification", ComponentLink3URL=http://www.onsemi.cn/pub_link/Collateral/318-08.PDF, Configuration=Single, Coss Typ (pF)=25, Crss Typ (pF)=16, DatasheetVersion="Rev. 1", ID Max (A)=2.2, Mounting Technology="Surface Mount", PackageDescription="3-Pin Small Outline Transistor, Body 2.92 x 1.3 mm, Pitch 0.95 mm", PackageReference=SOT-23-3-318-08, PackageVersion="Rev. AP, 11/2009", Packing="Tape and Reel", PartNumber=NVR5198NLT1G, Qrr Typ (nC)=6, RoHS=Pb-Free, V(BR)DSS Min (V)=60, VGS(th) Max (V)=2.5, VGS Max (V)=20
R1 R3: library part CMP-1015-00372-1, "60R4 0.5W 1% 1210 (3225 Metric)  SMD", Case-EIA=1210, Case-Metric=3225, Power="0.5 W", Tolerance="1 %", Technology=SMT
R2: library part CMP-1012-00061-1, "300R 0.1W 5% 0603 (1608 Metric)  SMD", Case-EIA=0603, Case-Metric=1608, Power="0.1 W", Tolerance="5 %", Technology=SMT
R4 R5 R7 R10 R13 R14 R15 R21 R22 R25 R26 R28 R29: library part CMP-1012-00074-1, "1K 0.1W 5% 0603 (1608 Metric)  SMD", Case-EIA=0603, Case-Metric=1608, Power="0.1 W", Tolerance="5 %", Technology=SMT
R6 R8 R9 R27: library part CMP-1012-00082-1, "2K2 0.1W 5% 0603 (1608 Metric)  SMD", Case-EIA=0603, Case-Metric=1608, Power="0.1 W", Tolerance="5 %", Technology=SMT
R11 R20: library part CMP-1012-00098-1, "10K 0.1W 5% 0603 (1608 Metric)  SMD", Case-EIA=0603, Case-Metric=1608, Power="0.1 W", Tolerance="5 %", Technology=SMT
R12: library part CMP-1012-00090-1, "4K7 0.1W 5% 0603 (1608 Metric)  SMD", Case-EIA=0603, Case-Metric=1608, Power="0.1 W", Tolerance="5 %", Technology=SMT
R16: library part CMP-1015-00097-1, "9K1 0.5W 5% 1210 (3225 Metric)  SMD", Case-EIA=1210, Case-Metric=3225, Power="0.5 W", Tolerance="5 %", Technology=SMT
R17 R19: library part CMP-1591-00001-1, "0603 (1608 Metric) Chip Resistor", Case-EIA=0603, Case-Metric=1608, PackageReference=RESC0603(1608)
R18 R23 R24 R30: library part CMP-1015-00074-1, "1K 0.5W 5% 1210 (3225 Metric)  SMD", Case-EIA=1210, Case-Metric=3225, Power="0.5 W", Tolerance="5 %", Technology=SMT
SW1: library part CMP-2100-03586-1, "Ultra-Small Tactile Switch, 0.05 A, 12 V, -25 to 70 degC, 2-Pin SMD, RoHS, Tape and Reel", Case/Package=SMD/SMT, Contact Current Rating=50mA, Insulation Resistance=100MOhm, Manufacturer="Omron Electronic Components", Max Operating Temperature=70degC, Min Operating Temperature=-25degC, Operating Force=1.5N, Package Description="2-Pin Surface Mount Device, Body 3 x 2.5 mm", Package Quantity=1, Package Reference=B3U-1000, Voltage Rating (DC)=12V, Actuator Length=0.4mm, Contact Material=Silver, Current Rating=50mA, Datasheet URL=http://www.omron.com/ecb/products/pdf/en-b3u.pdf, Datasheet Version=42005.0, Depth=2.5mm, Electrical Life=200000Cycles, Height=1.2mm, Illumination Type=Illuminated, Lead Free=LeadFree, Length=4mm, Manufacturer URL=http://www.omron.com/, Max Current Rating=50mA, Mount=SurfaceMount, Orientation=Straight, Packaging=TapeandReel, REACH SVHC=Unknown, RoHSCompliant=true, Switch Travel=0.15mm, Termination=SMD/SMT, Throw Configuration=SPST, Weight=0.022g, Width=3mm
U3 U4 U5 U10: library part CMP-0055-00796-3, "Low Power Dual Operational Amplifier, 8-pin Narrow SOIC", Manufacturer="Texas Instruments", Package Reference=D0008A, PackageTopMarking=NSZXTT*LM*358AM, PowerWise=N, Code_IPC=SOIC127P600-8, Code_JEDEC=MS-012-AA, ComponentLink1Description="Datasheet URL", ComponentLink1URL=http://www.ti.com/general/docs/lit/getliterature.tsp?genericPartNumber=LM358-N&fileType=pdf, CompType=Amplifiers, PackageDescription="SOIC Narrow, 4.9 x 3.9 x 1.45mm, 8 Lead, 1.27mm Pitch", PinCount=8, RoHS=N
U6 U8 U9 U14: library part CMP-0859-00033-4, "Single Schmitt-Trigger Buffer, DBV0005A, LARGE T&R", F @ Nom Voltage(Max)(Mhz)=150, Generic Part Number=SN74LVC1G17, ICC @ Nom Voltage(Max)(mA)=0.01, Manufacturer="Texas Instruments", Operating Temperature Range(C)="-40 to 125,-40 to 85", Rating=Catalog, tpd @ Nom Voltage(Max)(ns)=11,6.5,5.5,5, Voltage(Nom)(V)=1.8,2.5,3.3,5, 3-State Output=No, Bits(#)=1, DatasheetVersion=SCES351V, Input Type=CMOS/TTL, Logic=True, Output Drive (IOL/IOH)(Max)(mA)=32/-32, Output Type=CMOS, PackageReference=DBV0005A, Schmitt Trigger=Yes, Sub-Family="Non-Inverting Buffer/Driver", Technology Family=LVC, VCC(Max)(V)=5.5, VCC(Min)(V)=1.65
U7: library part CMP-0095-00577-1, "8-bit AVR Microcontroller, 128KB Flash, 4KB EEPROM, 16KB SRAM, 44-pin TQFP, Industrial Grade (-40°C to 85°C)", Code_JEDEC=MS-026-ACB, ComponentLink1Description="Manufacturer URL", ComponentLink1URL=http://www.atmel.com/, ComponentLink2Description="ATmega164A/164PA/324A/324PA/644A/644PA/1284/1284P Datasheet", ComponentLink2URL=http://www.atmel.com/dyn/resources/prod_documents/doc8272.pdf, ComponentLink3Description="ATmega164A/164PA/324A/324PA/644A/644PA/1284/1284P Summary", ComponentLink3URL=http://www.atmel.com/dyn/resources/prod_documents/8272S.pdf, DatasheetVersion="revC, Jun-2011", PackageDescription="44-Pin Plastic Thin Profile Quad Flat Pack, 10 x 10 x 1.0 mm Body, 0.8 mm Pitch (TQFP)", PackageReference=44A, PackageVersion="revC, Oct-2010"
U11: library part CMP-2000-07234-1, "Optocoupler, Phototransistor Output, VCEO 70 V, -55 to 100 degC, 4-Pin SOP (SOP4L), RoHS, Tape and Reel", Manufacturer=Vishay/Semiconductor, Maximum Collector Current=50mA, Maximum Collector Emitter Saturation Voltage=300mV, Maximum Collector Emitter Voltage=70V, Maximum Current Transfer Ratio @ Current=600%, Maximum Forward Voltage=1.6V, Maximum Input Current=60mA, Maximum Power Dissipation=250mW, Maximum Reverse Voltage=6V, Minimum Isolation Voltage=5000Vrms, Operating Temperature=-40to100°C, Package=4SOP, Package Description="4-Pin Small Outline Package Integrated Circuit, Body 4.1 x 7.5 mm, Pitch 2.54 mm", Package Reference=SOP4L, Typical Forward Voltage=1.25V, Category=TransistorandPhotovoltaicOutputPhotoCouplers, Datasheet URL=http://www.vishay.com/docs/83515/tclt1000.pdf, Datasheet Version="Rev. 2.9, 12/2015", Input Type=DC, Manufacturer URL=http://www.vishay.com/, Mounting Technology=SurfaceMount, Number of Channels per Chip=1, Output Type=DC, Packaging=Tape&Reel
U12: library part CMP-0062-02197-3, "100 mA, Quasi Low-Dropout Linear Voltage Regulator, 3-pin SOT-23, Pb-Free", Manufacturer="Texas Instruments", PackageTopMarking=L0C*XTT, PowerWise=N, ComponentLink1Description="Datasheet URL", ComponentLink1URL=http://www.ti.com/general/docs/lit/getliterature.tsp?genericPartNumber=LM3480&fileType=pdf, CompType="LDO IC", PackageDescription="Molded SOT-23, .115 x .051 x .037in Body, 3 Lead, .075 in Pitch", PackageReference=DBZ0003A, PinCount=3, RoHS=Y
Z1: library part LogicAnalyer
X1: ComponentLink1Description=LCSC, ComponentLink1URL=https://lcsc.com/product-detail/SMD-Crystal-Resonators_Yangxing-Tech-X322520MSB4SI_C9004.html
X2: ComponentLink1Description=LCSC, ComponentLink1URL=https://lcsc.com/product-detail/SMD-Crystal-Resonators_Yangxing-Tech-X322516MOB4SI_C12668.html

## Nets (pads, with @x,y where several pads share a name; then routed paths per layer and width w, separated by ;. In a path a pad name is that pad's centre, name@x,y a point inside that pad or via, vN(x,y) a via of type N, cw(c..) or ccw(c..) an arc to the next point about the centre after c; other vN are vias at no path point)
+5: C2.2 C3.2 P2.2 R4.2 R5.2 R17.2 R20.2 R25.2 U1.14 U2.3 U3.8 U4.8 U5.8 U6.5 U7.17 U7.38 U8.5 U9.5 U14.5
+12: J1.2 J5.1 Q1.3 Q5.3 R6.2 R7.2 R14.2
+12_ISO: C15.1 R23.2 TP23.1 U10.8 U12.1
CAN_CS: U1.13 U7.43 Z1.4
CAN_CTRL_CLKO: U1.3
CAN_INT: U1.4 U7.40 Z1.5
CAN_INT0: U1.9 U7.42
CAN_INT1: U1.8 U7.41 Z1.6
CAN_N: D1.1 J5.10 R3.1 TP4.1 U2.6
CAN_P: D1.2 J5.3 R1.2 TP1.1 U2.7
CAN_RX: DS2.2 TP3.1 U1.2 U2.4
CAN_RX_LED: DS2.1 R5.1
CAN_SPLIT: C1.2 R1.1 R2.2 R3.2
CAN_SPLIT_R: R2.1 U2.5
CAN_TX: DS1.2 TP2.1 U1.1 U2.1
CAN_TX_LED: DS1.1 R4.1
CAN_X1_20MHz: C4.2 U1.6 X1.1
CAN_X2_20MHz: C5.2 U1.5 X1.3
GND: C1.1 C2.1 C3.1 C4.1 C5.1 C6.2 C7.2 C8.2 C9.1 C10.1 C13.2 D1.3 D2.1 D3.2 DS3.2 DS4.2 DS5.2 DS6.2 DS7.2 DS9.2 J1.1 J1.3 J5.12 P1.1 P2.6 Q2.2 Q4.2 Q6.2 R8.1 R9.1 R12.1 R13.1 R19.1 SW1.1 U1.7 U2.2 U2.8 U3.4 U4.4 U5.4 U6.3 U7.6 U7.18 U7.28 U7.39 U8.3 U9.3 U11.2 U11.3 U14.3 X1.2 X1.4 X2.2 X2.4 Z1.10
GND_ALT: J1.4 J5.11
HV: J4.1 J4.3 J6.1 J6.3 R16.2 R30.2
HV_GND: C11.2 C12.2 C14.2 C15.2 D4.2 DS8.2 J4.2 J4.4 J6.2 J6.4 R18.1 R24.1 U10.4 U12.3
HV_ISO_ACTIVE: C13.1 R27.2 R28.2 TP21.1 U10.1
HV_REF_ACTIVE: C12.1 R23.1 R24.2 TP19.1 U10.3
HV_SPLIT: C11.1 R16.1 R18.2 TP18.1 U10.2
IMD_MEASUREMENT: U3.1 U3.2 U7.37
IMD_MEASUREMENT_12V: J1.5 R9.2 TP5.1 U3.3
IMD_MEASUREMENT_LOW: J1.6 R6.1 TP6.1
IMD_STATUS: Q2.1 U3.6 U3.7 U7.34 U14.2
IMD_STATUS_12V: J1.8 R8.2 TP7.1 U3.5
LEM_BUFFERED: TP12.1 U4.6 U4.7 U5.3 U7.36
LEM_BUFFERED_RAW: TP10.1 U4.1 U4.2 U7.35
LEM_MEASUREMENT: R13.2 TP13.1 U4.5
LEM_RESISTOR: J2.2 Q4.3
LEM_SIM: R17.1 R19.2 TP16.1 U5.2
LEM_SIM_N: J2.1
LEM_VREF: TP11.1 U4.3
MCU_AREF: U7.29
MCU_AVCC: C8.1 L1.1 U7.27
MCU_CLK: P2.3 U1.10 U7.3 Z1.3
MCU_LED_A: R21.2 U7.15
MCU_LED_A_LED: DS5.1 R21.1
MCU_LED_B: R22.2 U7.16
MCU_LED_B_LED: DS6.1 R22.1
MCU_MISO: P2.1 U1.12 U7.2 Z1.2
MCU_MOSI: P2.4 U1.11 U7.1 Z1.1
MCU_PA5: U7.32
MCU_PA6: U7.31
MCU_PA7: U7.30
MCU_PB4: U7.44
MCU_PC0: U7.19
MCU_PC1: U7.20
MCU_PC2: U7.21
MCU_PC3: U7.22
MCU_PC4: U7.23
MCU_PC5: U7.24
MCU_PC6: U7.25
MCU_PC7: U7.26
MCU_PD2: U7.11
MCU_PD3: U7.12
MCU_PD4: U7.13
MCU_PD5: U7.14
MCU_RESET: C7.1 P2.5 R20.1 SW1.2 U7.4
MCU_UART_RX: P1.3 U7.9
MCU_UART_TX: P1.2 U7.10
MCU_XTAL_1: C9.2 U7.8 X2.1
MCU_XTAL_2: C10.2 U7.7 X2.3
NetC6_1: C6.1 D2.2 D3.1 Q4.1 R11.1 R12.2 TP9.1
NetC14_1: C14.1 D4.1 R30.1 U12.2
NetDS3_1: DS3.1 R10.1
NetDS4_1: DS4.1 R15.1
NetDS7_1: DS7.1 R26.1
NetDS8_1: DS8.1 R28.1
NetDS9_1: DS9.1 R29.1
NetJ5_2: J5.2 R11.2
NetJ5_5: J5.5
NetJ5_6: J5.6
NetJ5_7: J5.7
NetJ5_9: J5.9 Q5.2 TP17.1
NetL1_2: L1.2 U7.5
NetQ1_1: Q1.1 Q2.3 R7.1
NetQ1_2: Q1.2 TP8.1
NetQ5_1: Q5.1 Q6.3 R14.1
NetQ6_1: Q6.1 TP15.1 U6.4
NetR10_2: R10.2 U14.4
NetR15_2: R15.2 TP14.1 U5.1 U6.2
NetR27_1: R27.1 U11.1
NetU5_6: U5.6 U5.7
NetZ1_7: Z1.7
NetZ1_8: Z1.8
TSAL_ACTIVE: R26.2 TP20.1 U7.33 U8.4 U9.2
TSAL_INACTIVE: R29.2 U9.4
TSAL_SIG: R25.1 TP22.1 U8.2 U11.4
pads on no net: J1.7 J1.NC J2.NC J4.NC J5.4 J5.8 J5.NC J6.NC U5.5 U6.1 U8.1 U9.1 U10.5 U10.6 U10.7 U14.1 Z1.9

## Text inside footprints (layer, text, board x,y; h text height)
J5: Top Overlay "Board Edge" at 6945,3925 h32 r270; Top Overlay "DTM13-12PA" at 6715,4050 h60 r270; Top Overlay "1" at 6085,4275 h32 r270
P2: Top Overlay "6" at 11035,6205 h50 r90; Top Overlay "5" at 11135,6205 h50 r90; Top Overlay "2" at 11035,5845 h50 r90; Top Overlay "1" at 11135,5865 h50 r90
Z1: Top Overlay "Logic / Analyzer" at 10610,6085 h32; Top Overlay "Saleae / Clone" at 10610,5475 h32